# Allegro board 1.85x1.5_basic.brd
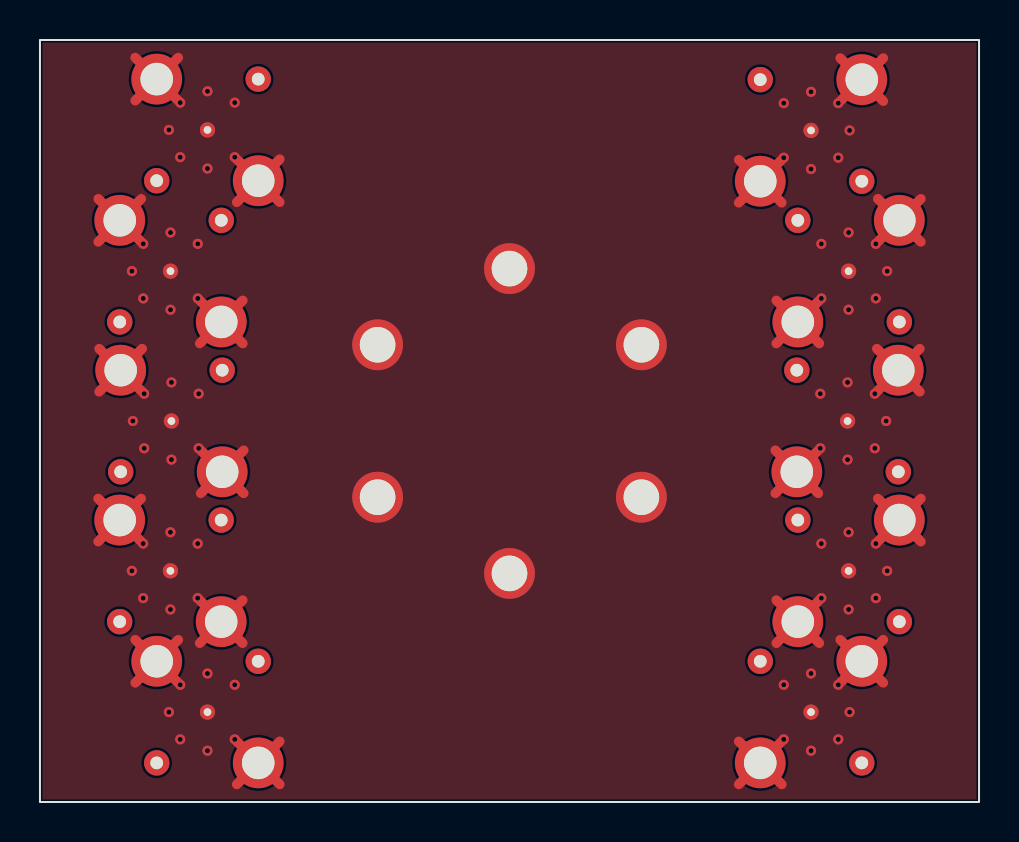
[diagram p0: board, top side]
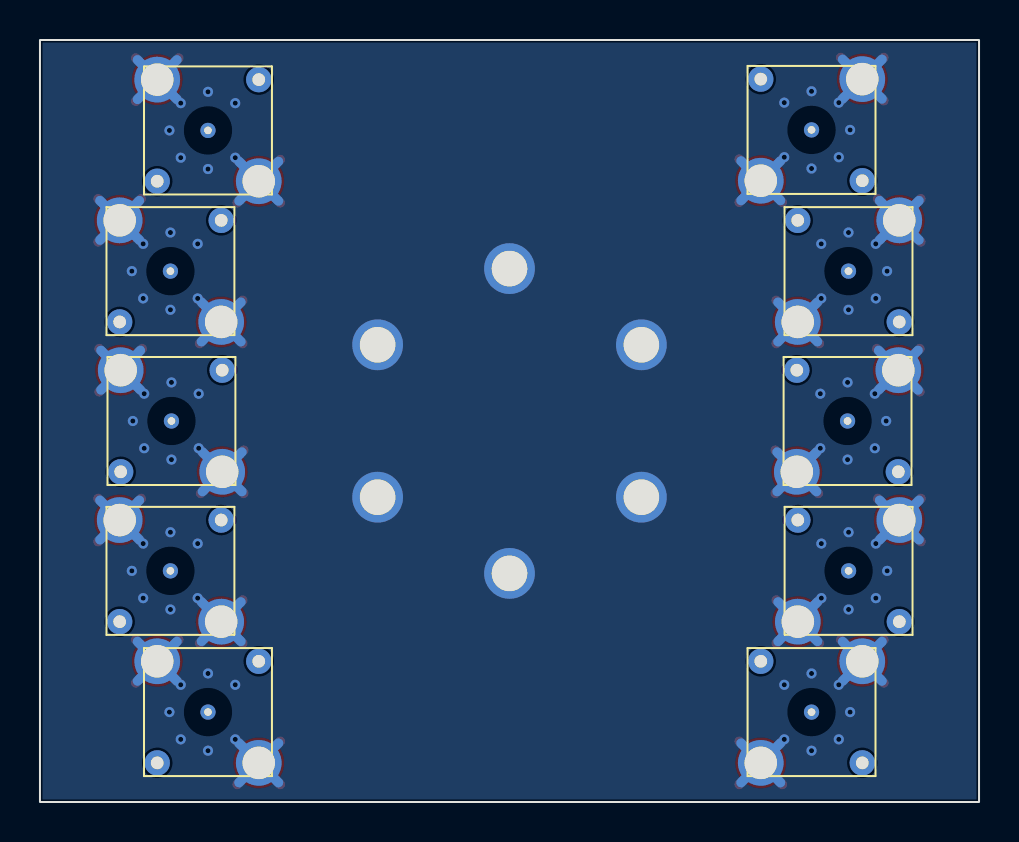
[diagram p1: board, bottom side, seen from below]

Outline 46.99 x 38.1 mm; copper layers: TOP, 02_GND, 03_SIG, BOTTOM. Coordinates in mm from the lower left corner of the outline.
Outline path: rectangle 0,0 46.99,38.1

## Placement (name value [footprint] x y rotation side)
J1  -  [SSMA_BB]  6.58 19.05 90 bottom
J2  -  [SSMA_BB]  40.41 19.05 180 bottom
J3  -  [SSMA_BB]  6.53 11.56 90 bottom
J4  -  [SSMA_BB]  40.46 11.56 180 bottom
J5  -  [SSMA_BB]  6.53 26.54 90 bottom
J6  -  [SSMA_BB]  40.46 26.54 180 bottom
J7  -  [SSMA_BB]  8.38 4.5 90 bottom
J8  -  [SSMA_BB]  38.58 4.5 180 bottom
J9  -  [SSMA_BB]  8.38 33.6 90 bottom
J10  -  [SSMA_BB]  38.58 33.58 180 bottom
MTG1  -  [HOLE070P]  23.5 26.67 0 top
MTG2  -  [HOLE070P]  30.09 22.86 300 top
MTG3  -  [HOLE070P]  30.09 15.24 240 top
MTG4  -  [HOLE070P]  23.5 11.43 180 top
MTG5  -  [HOLE070P]  16.9 15.24 120 top
MTG6  -  [HOLE070P]  16.9 22.86 60 top

## Library data of the parts
J1-J10 = SSMA_BB
MTG1-MTG6 = HOLE070P

## Footprints (pads in the part's own frame, mm; a bottom-side part is the same pattern mirrored in y, then rotated)
HOLE070P
  round 2.54 hole 1.778: 1(0,0)
SSMA_BB
  round 1.27 hole 0.635: (-2.54,-2.54) (2.54,2.54)
  round 0.762 hole 0.381: 1(0,0)
  round 2.54 hole 1.626: 2(-2.54,2.54) 3(2.54,-2.54)

## Nets
GND: J1.2(TP-2) J1.3(TP-3) J2.2(TP-2) J2.3(TP-3) J3.2(TP-2) J3.3(TP-3) J4.2(TP-2) J4.3(TP-3) J5.2(TP-2) J5.3(TP-3) J6.2(TP-2) J6.3(TP-3) J7.2(TP-2) J7.3(TP-3) J8.2(TP-2) J8.3(TP-3) J9.2(TP-2) J9.3(TP-3) J10.2(TP-2) J10.3(TP-3) MTG1.1(TP-1) MTG2.1(TP-1) MTG3.1(TP-1) MTG4.1(TP-1) MTG5.1(TP-1) MTG6.1(TP-1)
MICROWAVE: J1.1(TP-1) J2.1(TP-1) J3.1(TP-1) J4.1(TP-1) J5.1(TP-1) J6.1(TP-1) J7.1(TP-1) J8.1(TP-1) J9.1(TP-1) J10.1(TP-1)

## Via types
v1: diameter 0.508, hole 0.254, TOP to BOTTOM, 70 vias

## Routing (per net, layer and track width the routed paths; a pad name or vN(x,y) marks a point on that pad's centre or on a via; arc(x,y) is an arc through that point)
GND: length 344.5
  TOP w0.483: J10.3 37.12,32.11 ; J10.3 34.97,29.96 ; J10.3 34.97,32.11 ; J10.3 37.12,29.96 ; 8.04,15.44 J1.2 ; J1.2 8.04,17.58 ; J1.2 10.19,15.44 ; J1.2 10.19,17.58 ; J2.3 38.95,15.44 ; J2.3 36.8,17.58 ; J2.3 36.8,15.44 ; J2.3 38.95,17.58 ; J1.3 5.11,20.52 ; J1.3 2.96,20.52 ; J1.3 5.11,22.66 ; J1.3 2.96,22.66 ; J4.2 44.08,15.17 ; J4.2 44.08,13.02 ; J4.2 41.93,13.02 ; J4.2 41.93,15.17 ; J9.2 12,29.99 ; J9.2 9.85,32.14 ; J9.2 12,32.14 ; J9.2 9.85,29.99 ; 43,29.08 44.08,30.16 ; 43,29.08 44.08,28.01 ; 43,29.08 41.93,28.01 ; 43,29.08 41.93,30.16 ; J9.3 6.92,35.07 ; J9.3 4.77,37.22 ; J9.3 6.92,37.22 ; J9.3 4.77,35.07 ; 37.92,9.02 39,10.09 ; 37.92,9.02 36.85,7.94 ; 37.92,9.02 36.85,10.09 ; 37.92,9.02 39,7.94 ; J3.3 5.06,13.02 ; J3.3 2.91,15.17 ; J3.3 5.06,15.17 ; J3.3 2.91,13.02 ; J8.2 42.2,8.11 ; J8.2 42.2,5.96 ; J8.2 40.05,8.11 ; J8.2 40.05,5.96 ; 40.05,35.04 J10.2 ; J10.2 42.2,37.19 ; J10.2 42.2,35.04 ; J10.2 40.05,37.19 ; 9.07,9.02 10.14,10.09 ; 9.07,9.02 7.99,10.09 ; 9.07,9.02 10.14,7.94 ; 9.07,9.02 7.99,7.94 ; 4.77,5.96 J7.3 ; J7.3 6.92,5.96 ; J7.3 4.77,8.11 ; J7.3 6.92,8.11 ; 3.99,29.08 5.07,30.16 ; 3.99,29.08 2.92,28.01 ; 3.99,29.08 2.92,30.16 ; 3.99,29.08 5.07,28.01 ; 9.85,3.03 J7.2 ; J7.2 12,3.03 ; J7.2 9.85,0.88 ; J7.2 12,0.88 ; 36.85,25.08 J6.3 ; J6.3 36.85,22.93 ; J6.3 39,25.08 ; J6.3 39,22.93 ; 34.97,0.88 J8.3 ; J8.3 34.97,3.03 ; J8.3 37.12,3.03 ; J8.3 37.12,0.88 ; 8,25.08 J5.2 ; J5.2 8,22.93 ; J5.2 10.15,22.93 ; J5.2 10.15,25.08 ; J2.2 44.03,20.52 ; J2.2 41.88,22.66 ; J2.2 44.03,22.66 ; J2.2 41.88,20.52
  03_SIG w0.483: J3.3 4.97,15.08 ; J3.3 4.97,13.11 ; J3.3 3,13.11 ; J3.3 3,15.08 ; J9.2 11.91,30.08 ; J9.2 9.94,32.05 ; J9.2 9.94,30.08 ; J9.2 11.91,32.05 ; J6.3 38.91,24.99 ; J6.3 36.94,23.02 ; J6.3 36.94,24.99 ; J6.3 38.91,23.02 ; 4.86,8.02 J7.3 ; J7.3 4.86,6.05 ; J7.3 6.83,6.05 ; J7.3 6.83,8.02 ; J8.2 42.11,6.05 ; J8.2 40.14,6.05 ; J8.2 42.11,8.02 ; J8.2 40.14,8.02 ; 8.13,17.5 J1.2 ; J1.2 10.1,15.52 ; J1.2 8.13,15.52 ; J1.2 10.1,17.5 ; 42.02,30.07 43,29.08 ; 43,29.08 43.99,28.1 ; 43,29.08 43.99,30.07 ; 43,29.08 42.02,28.1 ; 35.06,2.94 J8.3 ; J8.3 35.06,0.97 ; J8.3 37.03,2.94 ; J8.3 37.03,0.97 ; 3.01,30.07 3.99,29.08 ; 3.99,29.08 3.01,28.1 ; 3.99,29.08 4.98,30.07 ; 3.99,29.08 4.98,28.1 ; J10.3 37.03,32.02 ; J10.3 37.03,30.05 ; J10.3 35.06,30.05 ; J10.3 35.06,32.02 ; 9.94,0.97 J7.2 ; J7.2 9.94,2.94 ; J7.2 11.91,0.97 ; J7.2 11.91,2.94 ; 36.89,17.5 J2.3 ; J2.3 36.89,15.52 ; J2.3 38.86,15.52 ; J2.3 38.86,17.5 ; 3.05,22.58 J1.3 ; J1.3 5.02,20.6 ; J1.3 5.02,22.58 ; J1.3 3.05,20.6 ; 41.97,22.58 J2.2 ; J2.2 43.94,20.6 ; J2.2 43.94,22.58 ; J2.2 41.97,20.6 ; J5.2 10.06,23.02 ; J5.2 8.09,24.99 ; J5.2 10.06,24.99 ; J5.2 8.09,23.02 ; J10.2 42.11,35.13 ; J10.2 40.14,35.13 ; J10.2 42.11,37.1 ; J10.2 40.14,37.1 ; J9.3 6.83,37.13 ; J9.3 4.86,35.16 ; J9.3 6.83,35.16 ; J9.3 4.86,37.13 ; 9.07,9.02 10.05,8.03 ; 9.07,9.02 8.08,10 ; 9.07,9.02 10.05,10 ; 9.07,9.02 8.08,8.03 ; 36.94,10 37.92,9.02 ; 37.92,9.02 38.91,8.03 ; 37.92,9.02 38.91,10 ; 37.92,9.02 36.94,8.03 ; J4.2 43.99,13.11 ; J4.2 42.02,15.08 ; J4.2 42.02,13.11 ; J4.2 43.99,15.08
  BOTTOM w0.483: 41.97,22.58 J2.2 ; J2.2 43.94,20.6 ; J2.2 43.94,22.58 ; J2.2 41.97,20.6 ; 35.06,30.05 J10.3 ; J10.3 37.03,30.05 ; J10.3 37.03,32.02 ; J10.3 35.06,32.02 ; J1.2 10.1,17.5 ; J1.2 10.1,15.52 ; J1.2 8.13,15.52 ; J1.2 8.13,17.5 ; 42.02,13.11 J4.2 ; J4.2 43.99,15.08 ; J4.2 42.02,15.08 ; J4.2 43.99,13.11 ; J5.2 10.06,23.02 ; J5.2 8.09,24.99 ; J5.2 10.06,24.99 ; J5.2 8.09,23.02 ; 9.94,30.08 J9.2 ; J9.2 11.91,32.05 ; J9.2 11.91,30.08 ; J9.2 9.94,32.05 ; J7.3 6.83,6.05 ; J7.3 4.86,8.02 ; J7.3 6.83,8.02 ; J7.3 4.86,6.05 ; 3,15.08 J3.3 ; J3.3 4.97,15.08 ; J3.3 3,13.11 ; J3.3 4.97,13.11 ; J10.2 42.11,35.13 ; J10.2 42.11,37.1 ; J10.2 40.14,37.1 ; J10.2 40.14,35.13 ; 35.06,0.97 J8.3 ; J8.3 37.03,0.97 ; J8.3 35.06,2.94 ; J8.3 37.03,2.94 ; 3.99,29.08 4.98,30.07 ; 3.99,29.08 3.01,28.1 ; 3.99,29.08 4.98,28.1 ; 3.99,29.08 3.01,30.07 ; 8.08,8.03 9.07,9.02 ; 9.07,9.02 8.08,10 ; 9.07,9.02 10.05,10 ; 9.07,9.02 10.05,8.03 ; 43,29.08 43.99,28.1 ; 43,29.08 42.02,30.07 ; 43,29.08 43.99,30.07 ; 43,29.08 42.02,28.1 ; J6.3 38.91,23.02 ; J6.3 38.91,24.99 ; J6.3 36.94,23.02 ; J6.3 36.94,24.99 ; J8.2 42.11,6.05 ; J8.2 40.14,8.02 ; J8.2 40.14,6.05 ; J8.2 42.11,8.02 ; 36.89,17.5 J2.3 ; J2.3 36.89,15.52 ; J2.3 38.86,17.5 ; J2.3 38.86,15.52 ; 37.92,9.02 38.91,8.03 ; 37.92,9.02 36.94,8.03 ; 37.92,9.02 36.94,10 ; 37.92,9.02 38.91,10 ; J1.3 5.02,22.58 ; J1.3 5.02,20.6 ; J1.3 3.05,20.6 ; J1.3 3.05,22.58 ; J9.3 6.83,37.13 ; J9.3 4.86,35.16 ; J9.3 4.86,37.13 ; J9.3 6.83,35.16 ; J7.2 11.91,2.94 ; J7.2 11.91,0.97 ; J7.2 9.94,0.97 ; J7.2 9.94,2.94
  vias: v1(4.6,26.54) v1(4.6,11.56) v1(4.65,19.05) v1(5.17,27.91) v1(5.17,25.18) v1(5.21,20.41) v1(5.21,17.69) v1(5.16,12.92) v1(5.16,10.19) v1(6.45,33.6) v1(6.53,28.47) v1(6.53,24.61) v1(6.53,13.49) v1(6.53,9.63) v1(6.45,4.5) v1(6.58,20.98) v1(6.58,17.12) v1(7.02,34.97) v1(7.02,32.24) v1(7.02,5.86) v1(7.02,3.13) v1(7.9,27.91) v1(7.9,25.18) v1(7.94,20.41) v1(7.94,17.69) v1(7.89,12.92) v1(7.89,10.19) v1(8.38,35.53) v1(8.38,31.67) v1(8.38,6.43) v1(8.38,2.57) v1(9.75,34.97) v1(9.75,32.24) v1(9.75,5.86) v1(9.75,3.13) v1(37.22,34.94) v1(37.22,32.21) v1(37.22,5.86) v1(37.22,3.13) v1(38.58,35.51) v1(38.58,31.65) v1(38.58,6.43) v1(38.58,2.57) v1(39.1,27.91) v1(39.1,25.18) v1(39.05,20.41) v1(39.05,17.69) v1(39.1,12.92) v1(39.1,10.19) v1(39.95,34.94) v1(39.95,32.21) v1(39.95,5.86) v1(39.95,3.13) v1(40.41,20.98) v1(40.41,17.12) v1(40.51,33.58) v1(40.46,28.47) v1(40.46,24.61) v1(40.46,13.49) v1(40.46,9.63) v1(40.51,4.5) v1(41.83,27.91) v1(41.83,25.18) v1(41.78,20.41) v1(41.78,17.69) v1(41.83,12.92) v1(41.83,10.19) v1(42.34,19.05) v1(42.39,26.54) v1(42.39,11.56)

## Copper pours and planes (outline as drawn; the poured copper is in the pictures)
GND on TOP, BOTTOM, 02_GND, 03_SIG: 0.13,0.13 46.86,0.13 46.86,37.97 0.13,37.97
